# Altium PCB PCB1.PcbDoc
Units mil, origin at the board's own origin, x right, y up, seen from the top; angles counter-clockwise.
Board outline 6355 x 6010 mil, 2 copper layers (Top Layer, Bottom Layer); 79 components, 74 nets, 400 pads, 3 vias.
Unrouted connection lines stored in the file: 135.
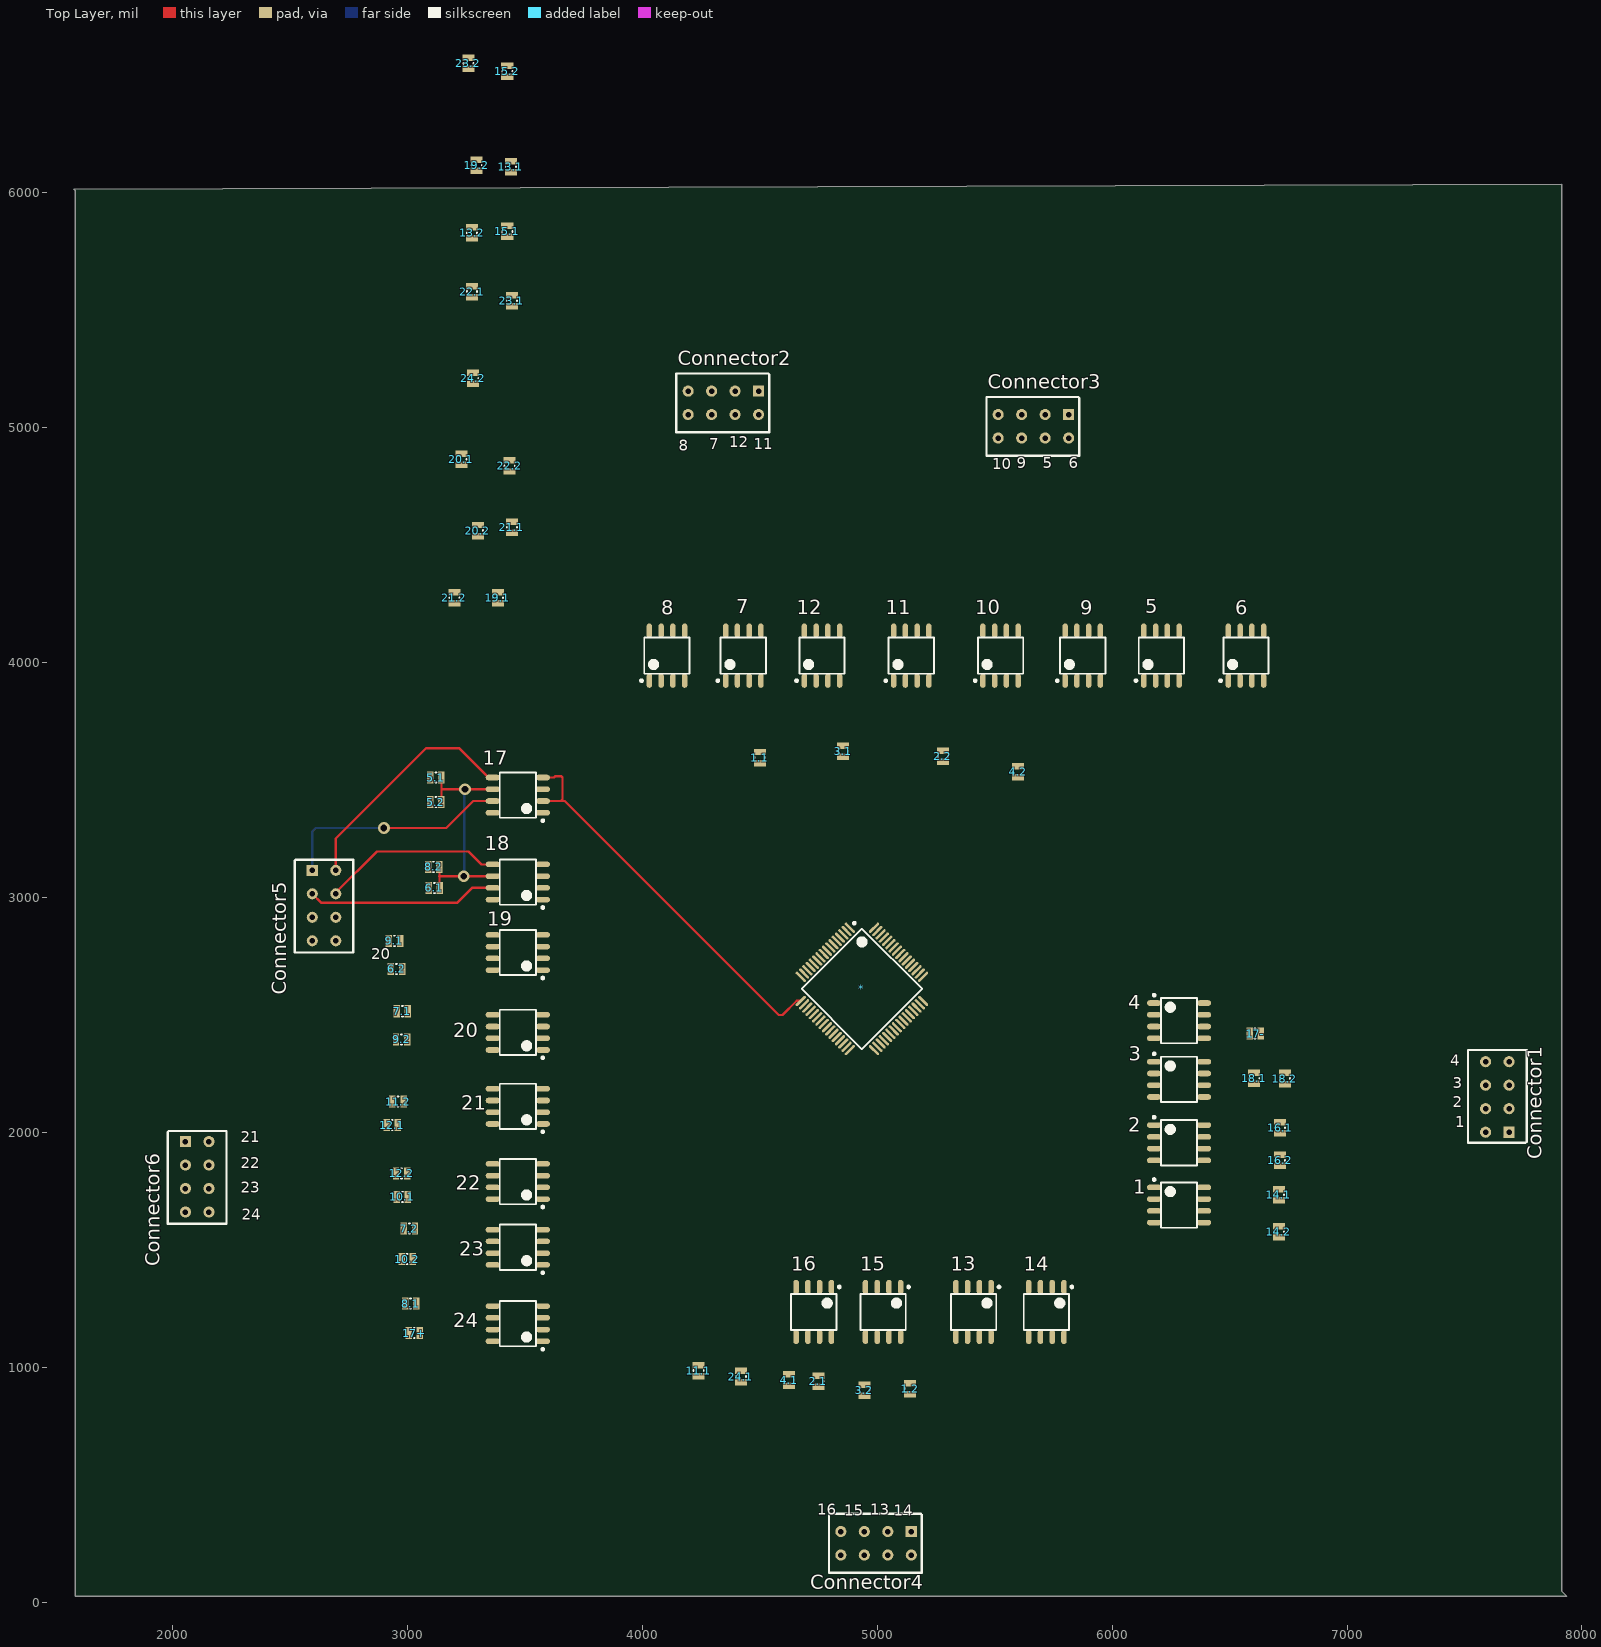
[diagram p0: Top Layer view]
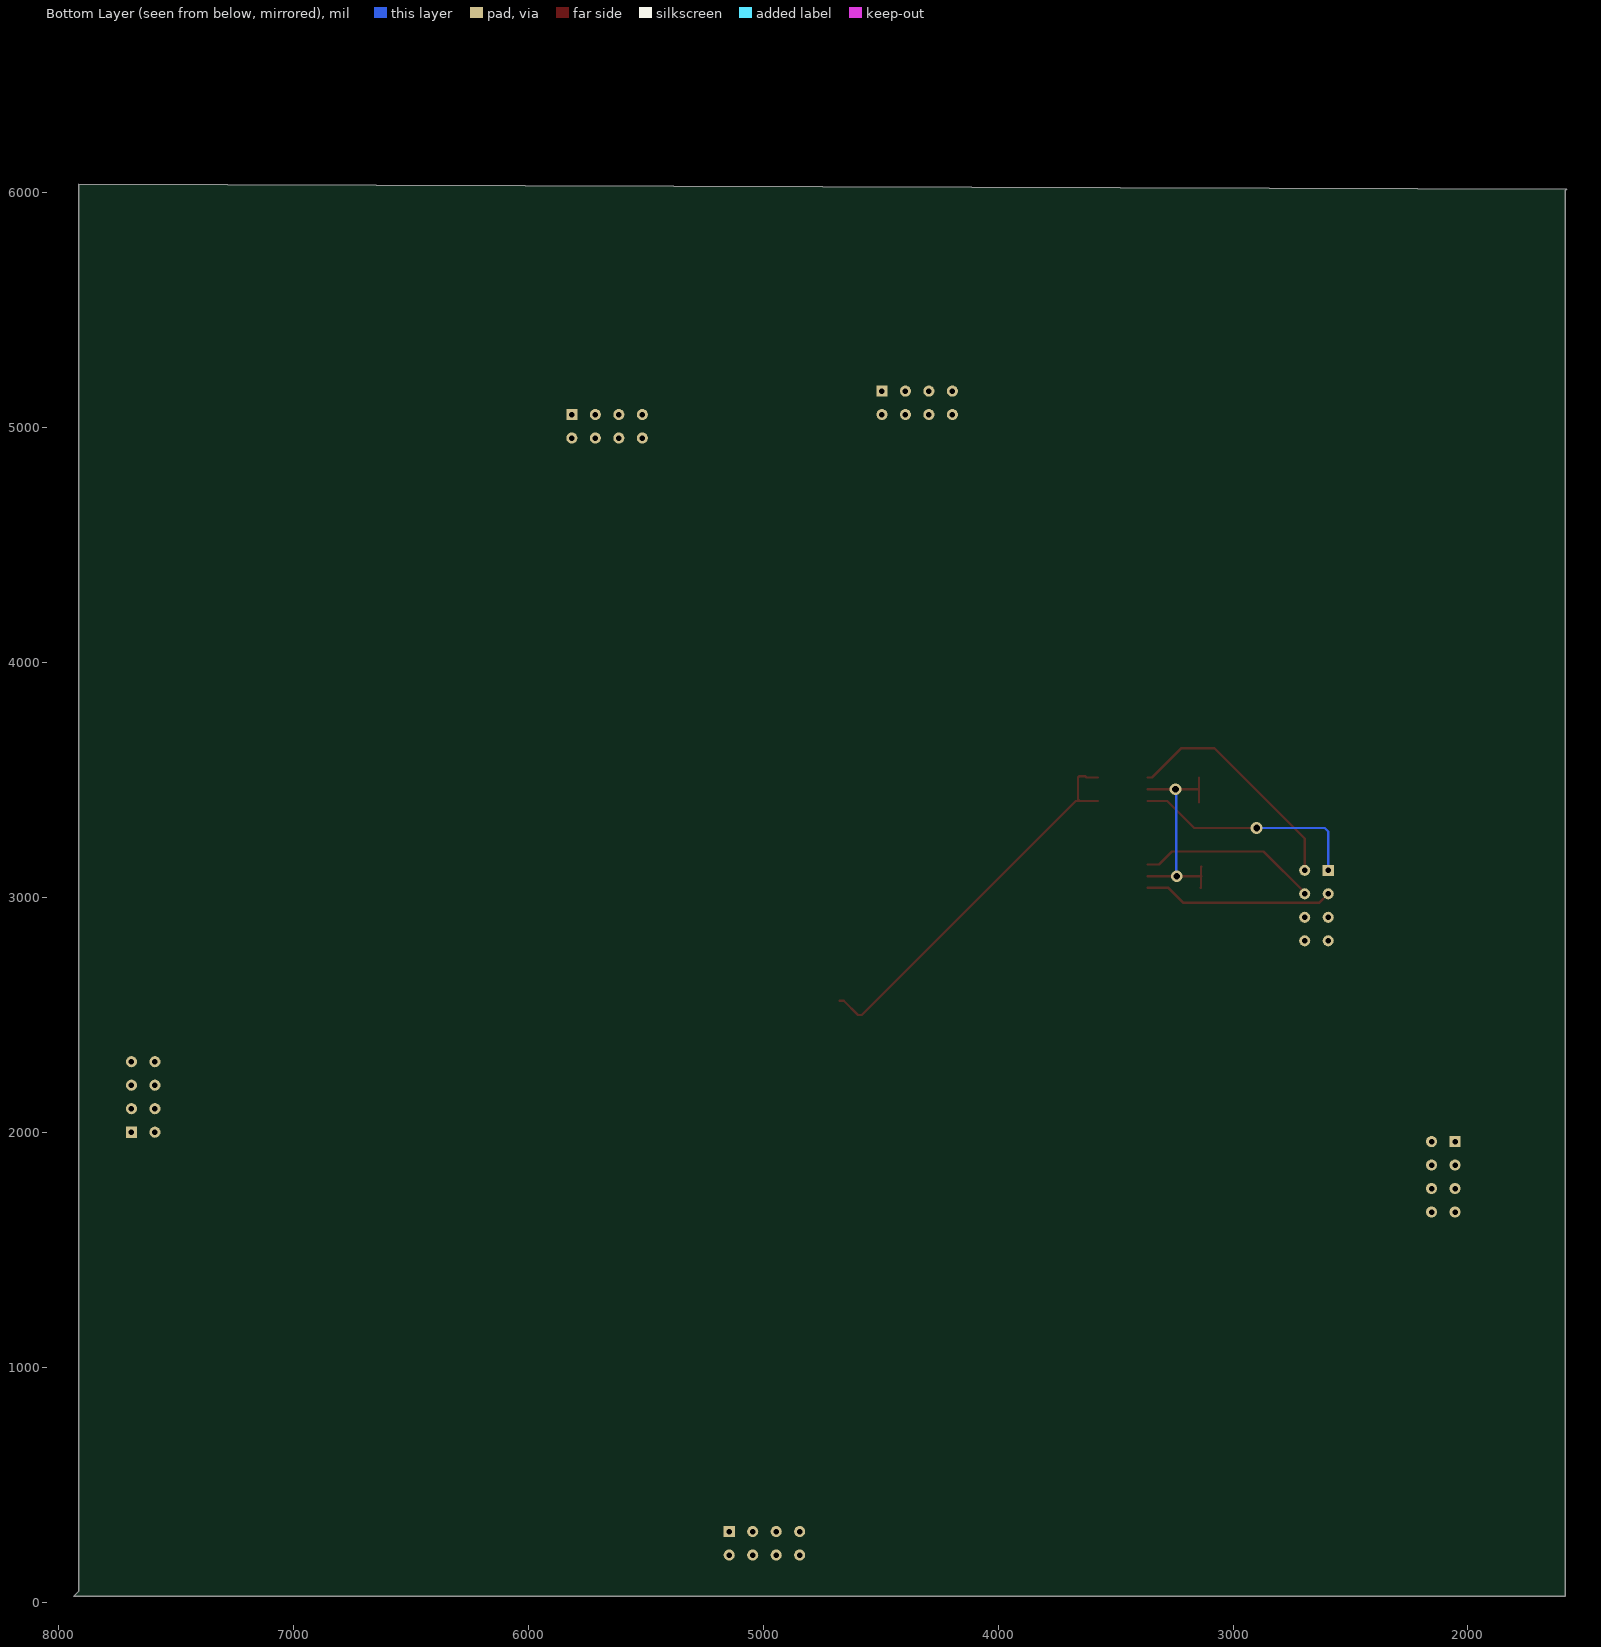
[diagram p1: Bottom Layer view, seen from below]

## Layer stack, top to bottom
Top Solder: solder mask 0.4, Solder Resist, Dk 3.5
Top Layer: signal copper 1.4
Dielectric 1: dielectric 12.6, FR-4, Dk 4.8
Bottom Layer: signal copper 1.4
Bottom Solder: solder mask 0.4, Solder Resist, Dk 3.5

## Board outline
1580,6015 1585,6010 1585,25 7935,25 7915,45 7915,6035

## Design rules (kind name [scope] priority, off if disabled: settings)
Clearance [All] p1: gap=10 ignorepadtopadclearanceinfootprint=FALSE except(0: Arc-Hole Track-Hole SMDPad-Hole THPad-Hole Via-Hole Fill-Hole Poly-Hole Region-Hole Text-Hole)
PolygonConnect [All] p1: connectstyle=Relief reliefconductorwidth=10 reliefentries=4 polygonreliefangle="90 Angle" airgapwidth=10
RoomDefinition "Final Design" [InComponentClass('Final Design')] p1: confinementstyle=ConfineIn formatcopy=TRUE lockcomponents=FALSE outline 0,0 2000,0 2000,1000 0,1000
RoutingVias [All] p1: holewidth=28 width=50 viastyle="Through Hole" minholewidth=28 minwidth=50 maxholewidth=28 maxwidth=50
SolderMaskExpansion [All] p1: expansion=4
Width [All] p1: maxlimit=10 minlimit=10 preferedwidth=10
30 further rules are at their usual default settings.

## Components (designator, comment, footprint, x,y, rotation, side; value= is the part's Value field where it differs from the comment)
1 "TC4428" TC4428 6285,1690 r0 top
1.1 "Capacitor" Chip2PinSM127P600-8N 4500,3595 r90 top
1.2 "Capacitor" Chip2PinSM127P600-8N 5140,908.62 r90 top
2 "TC4428" TC4428 6285,1955 r0 top
2.1 "Capacitor" Chip2PinSM127P600-8N 4750,940 r90 top
2.2 "Capacitor" Chip2PinSM127P600-8N 5280,3600 r90 top
3 "TC4428" TC4428 6285,2225 r0 top
3.1 "Capacitor" Chip2PinSM127P600-8N 4855,3621.38 r90 top
3.2 "Capacitor" Chip2PinSM127P600-8N 4945,901.38 r90 top
4 "TC4428" TC4428 6285,2475 r0 top
4.1 "Capacitor" Chip2PinSM127P600-8N 4625,945 r90 top
4.2 "Capacitor" Chip2PinSM127P600-8N 5600,3535 r90 top
5 "TC4428" TC4428 6210,4028.7 r90 top
5.1 "Capacitor" Chip2PinSM127P600-8N 3121.38,3510 r0 top
5.2 "Capacitor" Chip2PinSM127P600-8N 3121.38,3405 r0 top
6 "TC4428" TC4428 6570,4028.7 r90 top
6.1 "Capacitor" Chip2PinSM127P600-8N 3115,3040 r0 top
6.2 "Capacitor" Chip2PinSM127P600-8N 2953.62,2695 r0 top
7 "TC4428" TC4428 4430,4028.7 r90 top
7.1 "Capacitor" Chip2PinSM127P600-8N 2978.62,2515 r0 top
7.2 "Capacitor" Chip2PinSM127P600-8N 3008.62,1590 r0 top
8 "TC4428" TC4428 4105,4028.7 r90 top
8.1 "Capacitor" Chip2PinSM127P600-8N 3013.62,1270 r0 top
8.2 "Capacitor" Chip2PinSM127P600-8N 3111.38,3130 r0 top
9 "TC4428" TC4428 5875,4028.7 r90 top
9.1 "Capacitor" Chip2PinSM127P600-8N 2945,2815 r0 top
9.2 "Capacitor" Chip2PinSM127P600-8N 2975,2395 r0 top
10 "TC4428" TC4428 5525,4028.7 r90 top
10.1 "Capacitor" Chip2PinSM127P600-8N 2978.62,1725 r0 top
10.2 "Capacitor" Chip2PinSM127P600-8N 2998.62,1460 r0 top
11 "TC4428" TC4428 5145,4028.7 r90 top
11.1 "Capacitor" Chip2PinSM127P600-8N 4240,985 r90 top
11.2 "Capacitor" Chip2PinSM127P600-8N 2960,2130 r0 top
12 "TC4428" TC4428 4765,4028.7 r90 top
12.1 "Capacitor" Chip2PinSM127P600-8N 2935,2030 r0 top
12.2 "Capacitor" Chip2PinSM127P600-8N 2975,1825 r0 top
13 "TC4428" TC4428 5410,1235 r270 top
13.1 "Capacitor" Chip2PinSM127P600-8N 3440,6110 r90 top
13.2 "Capacitor" Chip2PinSM127P600-8N 3275,5828.62 r90 top
14 "TC4428" TC4428 5720,1235 r270 top
14.1 "Capacitor" Chip2PinSM127P600-8N 6710,1733.62 r90 top
14.2 "Capacitor" Chip2PinSM127P600-8N 6710,1576.38 r90 top
15 "TC4428" TC4428 5025,1235 r270 top
15.1 "Capacitor" Chip2PinSM127P600-8N 3425,5835 r90 top
15.2 "Capacitor" Chip2PinSM127P600-8N 3425,6516.38 r90 top
16 "TC4428" TC4428 4730,1235 r270 top
16.1 "Capacitor" Chip2PinSM127P600-8N 6715,2018.62 r90 top
16.2 "Capacitor" Chip2PinSM127P600-8N 6715,1880 r90 top
17 "TC4428" TC4428 3470,3435 r180 top
17+ "Capacitor" Chip2PinSM127P600-8N 3028.62,1145 r0 top
17- "Capacitor" Chip2PinSM127P600-8N 6608.62,2420 r0 top
18 "TC4428" TC4428 3470,3065 r180 top
18.1 "Capacitor" Chip2PinSM127P600-8N 6605,2230 r90 top
18.2 "Capacitor" Chip2PinSM127P600-8N 6735,2228.62 r90 top
19 "TC4428" TC4428 3470,2765 r180 top
19.1 "Capacitor" Chip2PinSM127P600-8N 3385,4275 r90 top
19.2 "Capacitor" Chip2PinSM127P600-8N 3295,6116.38 r90 top
20 "TC4428" TC4428 3470,2425 r180 top
20.1 "Capacitor" Chip2PinSM127P600-8N 3230,4865 r90 top
20.2 "Capacitor" Chip2PinSM127P600-8N 3300,4561.38 r90 top
21 "TC4428" TC4428 3470,2110 r180 top
21.1 "Capacitor" Chip2PinSM127P600-8N 3445,4575 r90 top
21.2 "Capacitor" Chip2PinSM127P600-8N 3200,4275 r90 top
22 "TC4428" TC4428 3470,1790 r180 top
22.1 "Capacitor" Chip2PinSM127P600-8N 3275,5578.62 r90 top
22.2 "Capacitor" Chip2PinSM127P600-8N 3435,4836.38 r90 top
23 "TC4428" TC4428 3470,1510 r180 top
23.1 "Capacitor" Chip2PinSM127P600-8N 3445,5540 r90 top
23.2 "Capacitor" Chip2PinSM127P600-8N 3260,6550 r90 top
24 "TC4428" TC4428 3470,1185 r180 top
24.1 "Capacitor" Chip2PinSM127P600-8N 4420,960 r90 top
24.2 "Capacitor" Chip2PinSM127P600-8N 3280,5210 r90 top
* "TM4C123GH6PM" TM4C123 4935,2610 r315 top
Connector1 "Connector" Connector 7690,2000 r180 top
Connector2 "Connector" Connector 4495,5155 r270 top
Connector3 "Connector" Connector 5815,5055 r270 top
Connector4 "Connector" Connector 5145,300 r270 top
Connector5 "Connector" Connector 2595,3115 r0 top
Connector6 "Connector" Connector 2055,1960 r0 top

## Footprints (in the part's own frame and the unit in brackets; to place one, negate y for a bottom-side part, rotate by r counter-clockwise, add the part's x,y. Pads: shape width x height; smd on the part's side, far side on the other; paste and mask are expansions set on the pad)
Chip2PinSM127P600-8N [mm]
  rect 0.7x1.3 smd: 1(-0.6,0) 2(0.6,0)
  silkscreen extent -0.05,-0.55 0.05,0.55, body extent -1,-0.6 1,0.6, height 0.55
Connector [mm]
  rect 1.2x1.2 hole 0.6: 1(0,0)
  round 1.2 hole 0.6: 2(0,-2.54) 3(0,-5.08) 4(0,-7.62) 5(2.54,-7.62) 6(2.54,-5.08) 7(2.54,-2.54) 8(2.54,0)
  silkscreen extent -1.91,-8.89 4.45,1.14
TC4428 [mm] "SOIC, 8-Leads, Body 4.90x3.90mm, Pitch 1.27mm, IPC Medium Density"
  oval 1.55x0.6 smd: 1(-2.7,1.905) 2(-2.7,0.635) 3(-2.7,-0.635) 4(-2.7,-1.905) 5(2.7,-1.905) 6(2.7,-0.635) 7(2.7,0.635) 8(2.7,1.905)
  silkscreen extent -2.82,-2.45 1.95,2.88, body extent -1.95,-2.45 1.95,2.45, height 1.75
TM4C123 [mm] "TSQFP, 64-Leads, Body 10.00x10.00mm, Pitch 0.50mm, IPC Medium Density"
  oval 1.45x0.3 smd: 1(-5.6,3.75) 2(-5.6,3.25) 3(-5.6,2.75) 4(-5.6,2.25) 5(-5.6,1.75) 6(-5.6,1.25) 7(-5.6,0.75) 8(-5.6,0.25) 9(-5.6,-0.25) 10(-5.6,-0.75) 11(-5.6,-1.25) 12(-5.6,-1.75) 13(-5.6,-2.25) 14(-5.6,-2.75) 15(-5.6,-3.25) 16(-5.6,-3.75) 33(5.6,-3.75) 34(5.6,-3.25) 35(5.6,-2.75) 36(5.6,-2.25) 37(5.6,-1.75) 38(5.6,-1.25) 39(5.6,-0.75) 40(5.6,-0.25) 41(5.6,0.25) 42(5.6,0.75) 43(5.6,1.25) 44(5.6,1.75) 45(5.6,2.25) 46(5.6,2.75) 47(5.6,3.25) 48(5.6,3.75)
  oval 0.3x1.45 smd: 17(-3.75,-5.6) 18(-3.25,-5.6) 19(-2.75,-5.6) 20(-2.25,-5.6) 21(-1.75,-5.6) 22(-1.25,-5.6) 23(-0.75,-5.6) 24(-0.25,-5.6) 25(0.25,-5.6) 26(0.75,-5.6) 27(1.25,-5.6) 28(1.75,-5.6) 29(2.25,-5.6) 30(2.75,-5.6) 31(3.25,-5.6) 32(3.75,-5.6) 49(3.75,5.6) 50(3.25,5.6) 51(2.75,5.6) 52(2.25,5.6) 53(1.75,5.6) 54(1.25,5.6) 55(0.75,5.6) 56(0.25,5.6) 57(-0.25,5.6) 58(-0.75,5.6) 59(-1.25,5.6) 60(-1.75,5.6) 61(-2.25,5.6) 62(-2.75,5.6) 63(-3.25,5.6) 64(-3.75,5.6)
  silkscreen extent -5.72,-4.6 4.6,4.6, body extent -5,-5 5,5, height 1.6

## Part data
1 2 3 4 5 6 7 8 9 10 11 12 13 14 15 16 17 18 19 20 21 22 23 24: "Dual High-Speed Power MOSFET Drivers"
*: "IC MCU 32BIT 256KB FLASH 64LQFP"

## Via types
v1: diameter 50, hole 28, Top Layer to Bottom Layer, 3 vias

## Nets (pads, with @x,y where several pads share a name; then routed paths per layer and width w, separated by ;. In a path a pad name is that pad's centre, name@x,y a point inside that pad or via, vN(x,y) a via of type N, cw(c..) or ccw(c..) an arc to the next point about the centre after c; other vN are vias at no path point)
1: 1.2 1.4 *.45
1+: 1.7 Connector1.1 | length 26.3
  Top Layer w10: Connector1.1@7671.38,1981.38 Connector1.1
1-: 1.5 Connector1.8
2: 2.2 2.4 *.46
2+: 2.7 Connector1.2
2-: 2.5 Connector1.7
3: 3.2 3.4 *.47
3+: 3.7 Connector1.3
3-: 3.5 Connector1.6
4: 4.2 4.4 *.48
4+: 4.7 Connector1.4
4-: 4.5 Connector1.5
5: 5.2 5.4 *.58
5+: 5.7 Connector3.2
5-: 5.5 Connector3.7
6: 6.2 6.4 *.57
6+: 6.7 Connector3.1
6-: 6.5 Connector3.8
7: 7.2 7.4 *.1
7+: 7.7 Connector2.3
7-: 7.5 Connector2.6
8: 8.2 8.4 *.4
8+: 8.7 Connector2.4
8-: 8.5 Connector2.5
9: 9.2 9.4 *.61
9+: 9.7 Connector3.3
9-: 9.5 Connector3.6
10: 10.2 10.4 *.62
10+: 10.7 Connector3.4
10-: 10.5 Connector3.5
11: 11.2 11.4 *.63
11+: 11.7 Connector2.1
11-: 11.5 Connector2.8
12: 12.2 12.4 *.64
12+: 12.7 Connector2.2
12-: 12.5 Connector2.7
13: 13.2 13.4 *.43
13+: 13.7 Connector4.2
13-: 13.5 Connector4.7
14: 14.2 14.4 *.44
14+: 14.7 Connector4.1
14-: 14.5 Connector4.8
15: 15.2 15.4 *.53
15+: 15.7 Connector4.3
15-: 15.5 Connector4.6
16: 16.2 16.4 *.10
16+: 16.7 Connector4.4
16-: 16.5 Connector4.5
17: 17.2 17.4 *.17 | length 1690.8
  Top Layer w10: 17.2 3654.14,3410 ; 17.4 3623.49,3510 3629.34,3515.86 3654.14,3515.86 3660,3510 3660,3415.86 3654.14,3410 ; *.17@4673.84,2559.36 4657.46,2559.36 4597.24,2499.14 4580.86,2499.14 3670,3410 3654.14,3410
17+: 17.7 Connector5.1 | length 977.5
  Top Layer w10: v1@2910,3295 3165,3295 3280,3410 17.7
  Bottom Layer w10: Connector5.1 2595,3280 2610,3295 v1(2900,3295)
17-: 17.5 Connector5.8 | length 1014.9
  Top Layer w10: Connector5.8 2695,3250 3080,3635 3220,3635 3345,3510 17.5
18: 18.2 18.4 *.18
18+: 18.7 Connector5.2 | length 811.1
  Top Layer w10: Connector5.2 2633.62,2976.38 3211.38,2976.38 3275,3040 18.7
18-: 18.5 Connector5.7 | length 769
  Top Layer w10: Connector5.7 2695,3020 2870,3195 3260,3195 3315,3140 18.5
19: 19.2 19.4 *.19
19+: 19.7 Connector5.3
19-: 19.5 Connector5.6
20: 20.2 20.4 *.20
20+: 20.7 Connector5.4
20-: 20.5 Connector5.5
21: 21.2 21.4 *.21
21+: 21.7 Connector6.1
21-: 21.5 Connector6.8
22: 22.2 22.4 *.22
22+: 22.7 Connector6.2
22-: 22.5 Connector6.7
23: 23.2 23.4 *.23
23+: 23.7 Connector6.3
23-: 23.5 Connector6.6
24: 24.2 24.4 *.24
24+: 24.7 Connector6.4
24-: 24.5 Connector6.5
+12: 1.6 2.6 3.6 4.6 5.1.2 5.2.2 5.6 6.1.2 6.6 7.6 8.2.2 8.6 9.6 10.6 11.6 12.6 13.6 14.6 15.6 16.6 17.6 18.6 19.6 20.6 21.6 22.6 23.6 24.6 | length 1016
  Top Layer w10: 3135,3090 3136.81,3090 ; 8.2.2 3136.81,3128.19 3136.81,3090 ; 6.1.2 3136.81,3041.81 3136.81,3090 ; 5.2.2 3145,3460 ; 5.1.2 3145,3460 ; 18.6 v1(3240,3090) 3136.81,3090 ; 17.6 v1(3245,3460) 3145,3460
  Bottom Layer w10: v1(3240,3090) 3242.5,3092.5 3242.5,3457.5 v1(3245,3460)
GND: 1.3 2.3 3.3 4.3 5.3 6.3 7.3 8.3 9.3 10.3 11.3 12.3 13.3 14.3 15.3 16.3 17.3 18.3 19.3 20.3 21.3 22.3 23.3 24.3
pads on no net: 1.1 1.1.1 1.1.2 1.2.1 1.2.2 1.8 2.1 2.1.1 2.1.2 2.2.1 2.2.2 2.8 3.1 3.1.1 3.1.2 3.2.1 3.2.2 3.8 4.1 4.1.1 4.1.2 4.2.1 4.2.2 4.8 5.1 5.1.1 5.2.1 5.8 6.1 6.1.1 6.2.1 6.2.2 6.8 7.1 7.1.1 7.1.2 7.2.1 7.2.2 7.8 8.1 8.1.1 8.1.2 8.2.1 8.8 9.1 9.1.1 9.1.2 9.2.1 9.2.2 9.8 10.1 10.1.1 10.1.2 10.2.1 10.2.2 10.8 11.1 11.1.1 11.1.2 11.2.1 11.2.2 11.8 12.1 12.1.1 12.1.2 12.2.1 12.2.2 12.8 13.1 13.1.1 13.1.2 13.2.1 13.2.2 13.8 14.1 14.1.1 14.1.2 14.2.1 14.2.2 14.8 15.1 15.1.1 15.1.2 15.2.1 15.2.2 15.8 16.1 16.1.1 16.1.2 16.2.1 16.2.2 16.8 17+.1 17+.2 17-.1 17-.2 17.1 17.8 18.1 18.1.1 18.1.2 18.2.1 18.2.2 18.8 19.1 19.1.1 19.1.2 19.2.1 19.2.2 19.8 20.1 20.1.1 20.1.2 20.2.1 20.2.2 20.8 21.1 21.1.1 21.1.2 21.2.1 21.2.2 21.8 22.1 22.1.1 22.1.2 22.2.1 22.2.2 22.8 23.1 23.1.1 23.1.2 23.2.1 23.2.2 23.8 24.1 24.1.1 24.1.2 24.2.1 24.2.2 24.8 *.2 *.3 *.5 *.6 *.7 *.8 *.9 *.11 *.12 *.13 *.14 *.15 *.16 *.25 *.26 *.27 *.28 *.29 *.30 *.31 *.32 *.33 *.34 *.35 *.36 *.37 *.38 *.39 *.40 *.41 *.42 *.49 *.50 *.51 *.52 *.54 *.55 *.56 *.59 *.60

## Polygon pours and split planes (outlines as drawn)
no net on Top Layer "Top Layer-No Net" (solid, pour order 6): 4670,2415
no net on Top Layer "Top Layer-No Net 1" (solid, pour order 4): 6180,-91936.11
no net on Top Layer "Top Layer-No Net 2" (solid, pour order 2): 6385,-91981.11

## Silkscreen, mask and mechanical layers (free items; w line width, h text height)
Top Overlay:
  text "12" at 4370,4900 h80
  text "7" at 4285,4890 h80
  text "11" at 4475,4890 h80
  text "8" at 4155,4885 h80
  text "9" at 5595,4810 h80
  text "5" at 5705,4810 h80
  text "6" at 5815,4810 h80
  text "10" at 5490,4805 h80
  text "20" at 2845,2720 h80
  text "4" at 7440,2265 h80
  text "3" at 7450,2170 h80
  text "2" at 7450,2090 h80
  text "1" at 7460,2005 h80
  text "21" at 2290,1940 h80
  text "22" at 2290,1830 h80
  text "23" at 2290,1725 h80
  text "24" at 2295,1610 h80
  text "16" at 4745,355 h80
  text "13" at 4970,355 h80
  text "15" at 4860,350 h80
  text "14" at 5070,350 h80